# Altium PCB 2226_RegThermiqueExtension.PcbDoc
Units mm, origin at the board's own origin, x right, y up, seen from the top; angles counter-clockwise.
Board outline 35.54 x 101.6 mm, 2 copper layers (Top Layer, Bottom Layer), stack 1.586 mm thick; 13 components, 5 nets, 24 pads, 45 vias.
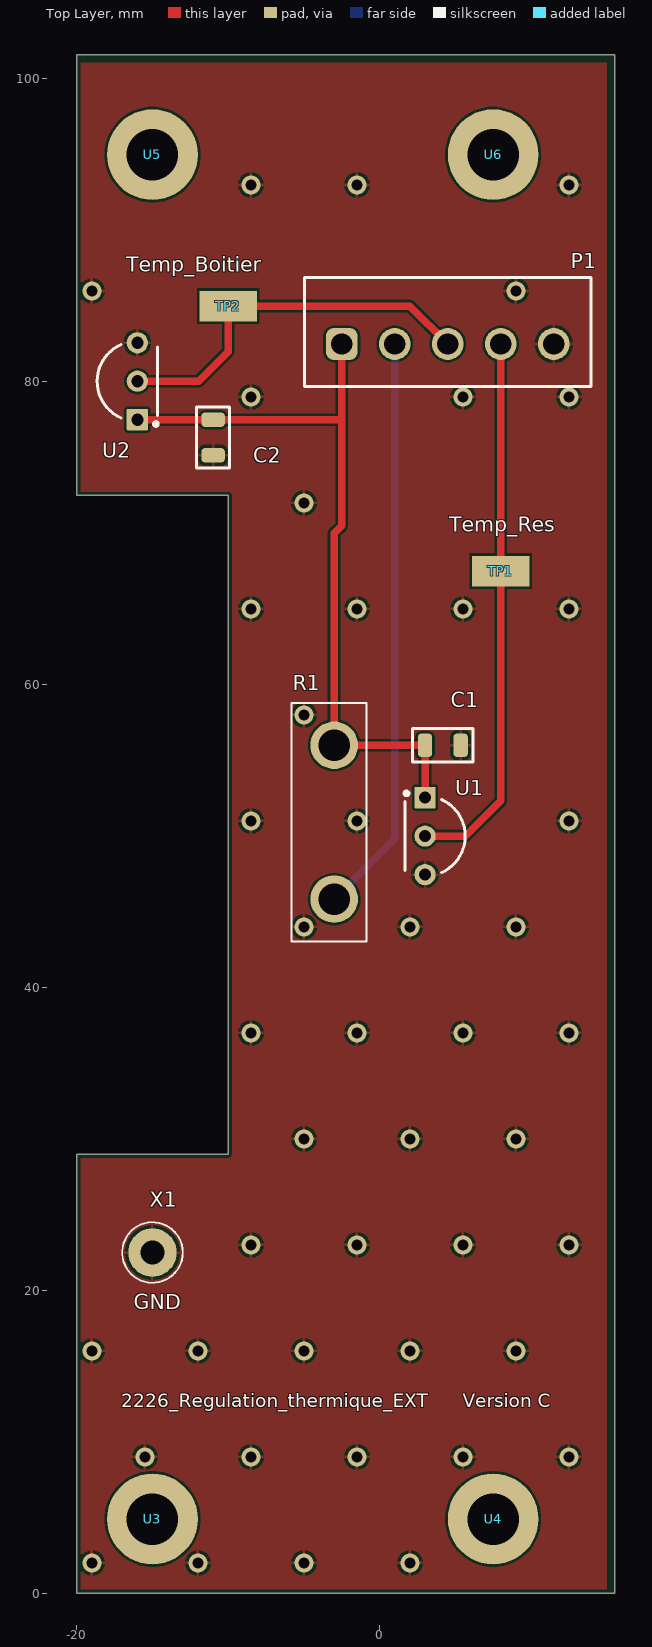
[diagram p0: Top Layer view]
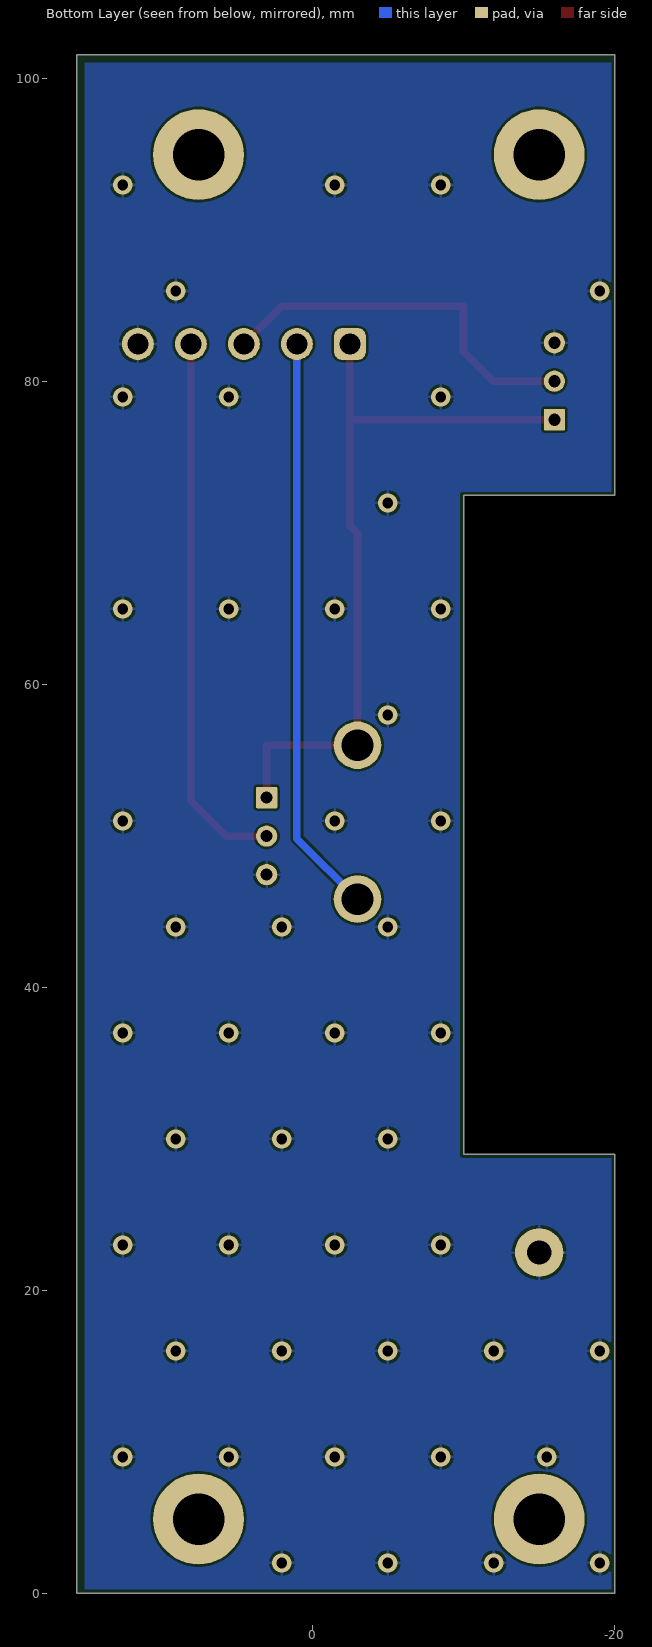
[diagram p1: Bottom Layer view, seen from below]

## Layer stack, top to bottom
Top Solder: solder mask 0.0102, Solder Resist, Dk 3.5
Top Layer: signal copper 0.018
Dielectric1: core 1.55, FR-4, Dk 4.8
Bottom Layer: signal copper 0.018
Bottom Solder: solder mask 0.0102, Solder Resist, Dk 3.5

## Board outline
-20,72.5 -20,101.6 15.54,101.6 15.54,0 -20,0 -20,28.985 -10,28.985 -10,72.5

## Design rules (kind name [scope] priority, off if disabled: settings)
BoardOutlineClearance [All] p1: gap=0.25 ignorepadtopadclearanceinfootprint=FALSE except(0: Arc-SplitContinuation Track-OutlineEdge Track-SplitContinuation SMDPad-SplitContinuation THPad-SplitContinuation Via-SplitContinuation Fill-SplitContinuation Poly-SplitContinuation Region-SplitContinuation Text-SplitContinuation)
Clearance Clearance-xPP-xTP-xTT [All] p1: gap=0.151 ignorepadtopadclearanceinfootprint=FALSE
ComponentClearance [All] p1: gap=0.25 collisioncheckmode=3 verticalgap=0.25 showdistances=FALSE
DiffPairsRouting [All] p1: maxlimit=0.25 minlimit=0.25 mostfreqgap=0.25 toplayer_minwidth=0.381 toplayer_maxwidth=0.381 toplayer_prefwidth=0.381 bottomlayer_minwidth=0.381 bottomlayer_maxwidth=0.381 bottomlayer_prefwidth=0.381 maxuncoupledlength=12.5
Height [All] p1: minheight=0 maxheight=25 prefheight=12.5
HoleSize HoleSize-PTH [All] p1: absolutevalues=TRUE maxlimit=10 minlimit=0.25 maxpercent=80.000 minpercent=20.000
HoleToHoleClearance [All] p1: gap=0.35 allowstackedmicrovias=TRUE
MinimumAnnularRing "Minimum IAR  >0.45mm" [((ObjectKind = 'Pad') OR (ObjectKind = 'Via')) And (Layer = 'MultiLayer') And (HoleDiameter > AsMM(0.45))] p1: minimumring=0.175 // minimum inner annular ring for pads > 0.45mm finished hole size
MinimumAnnularRing "Minimum IAR <=0.45mm" [((ObjectKind = 'Pad') OR (ObjectKind = 'Via')) And (Layer = 'MultiLayer') And (HoleDiameter <= AsMM(0.45))] p2: minimumring=0.175 // minimum inner annular ring for pads <= 0.45mm finished hole size
MinimumSolderMaskSliver [All] p1: minsoldermaskwidth=0.08
PasteMaskExpansion [All] p1: expansion=-0.025
PlaneClearance PlaneClearance-IPI [All] p1: clearance=0.5
PlaneConnect [All] p1: planeconnectstyle=Relief reliefexpansion=0.175 reliefentries=4 reliefconductorwidth=0.2 reliefairgap=0.2
PolygonConnect PolygonConnect-xTW [All] p1: connectstyle=Relief reliefconductorwidth=0.2 reliefentries=4 polygonreliefangle="90 Angle" airgapwidth=0.2
RoomDefinition Extension [InComponentClass('Extension')] p1: confinementstyle=ConfineIn formatcopy=TRUE lockcomponents=FALSE outline -184,-70.197 491.066,-70.197 491.066,147.5 -184,147.5
RoutingCorners [All] p1: cornerstyle=45-Degree minsetback=2.5 maxsetback=2.5
RoutingVias RoutingViasES [All] p1: holewidth=0.3 width=0.65 viastyle="Through Hole" minholewidth=0.25 minwidth=0.61 maxholewidth=1 maxwidth=1.5 // finishet hole size <= 0.45mm
SilkToSilkClearance [All] p1: silktosilkclearance=0
SilkToSolderMaskClearance SilkscreenOverComponentPads [IsPad] p1: minsilkscreentomaskgap=0 clearancetoexposedcopper=TRUE
SolderMaskExpansion [All] p1: expansion=0 istentingtop=FALSE
SupplyNets "Schematic Supply Nets_1" [InNet('GND')] p1: voltage=0.000
SupplyNets "Schematic Supply Nets" [InNet('+12V')] p2: voltage=0.000
UnRoutedNet [All] p1: checkbadconnections=TRUE
Width Width_C12_2 [InNet('NetC12_2')] p1: maxlimit=1.5 minlimit=0.5 preferedwidth=1.5
Width Width_B1_5 [InNet('NetB1_5')] p2: maxlimit=1.5 minlimit=0.5 preferedwidth=1.5
Width Width_C1_1 [InNet('NetC1_1')] p3: maxlimit=1.5 minlimit=0.5 preferedwidth=1.5
Width Width_12V [InNet('IN12V')] p4: maxlimit=1.5 minlimit=0.5 preferedwidth=0.5
Width Width-Vcc_PV [InNet('Vcc_PV')] p5: maxlimit=1.5 minlimit=0.5 preferedwidth=1
Width Width-Vcc_D5_A [InNet('NetD5_A')] p6: maxlimit=1.5 minlimit=0.5 preferedwidth=1
Width Width-Vcc_MOT+ [InNet('MOT+')] p7: maxlimit=1.5 minlimit=0.5 preferedwidth=1
Width Width-Vcc_MOT- [InNet('MOT-')] p8: maxlimit=1.5 minlimit=0.5 preferedwidth=1
Width Width_GND [InNet('GND')] p9: maxlimit=0.5 minlimit=0.254 preferedwidth=0.5
Width [All] p10: maxlimit=0.5 minlimit=0.254 preferedwidth=0.254
17 further rules are at their usual default settings.

## Components (designator, comment, footprint, x,y, rotation, side; value= is the part's Value field where it differs from the comment)
C1 "100nF" CAPC2012X08M 4.175,56 r180 top
C2 "100nF" CAPC2012X08M -11,76.325 r90 top
P1 "691321100005" 691321100005 4.5,83.3 r0 top
R1 "10R" TO1016P1601X521X2451-2 -3,50.92 r90 top
TP1 "Sensor_Temp_RP" KSTN-5019_V 8,67.5 r0 top value=5019
TP2 "Sensor_Temp_Boîtier" KSTN-5019_V -10,85 r180 top value=5019
U1 "LM35CAZ/LFT4" LM35CAZ/LFT4 3,50 r0 top
U2 "LM35CAZ/LFT4" LM35CAZ/LFT4 -16,80.04 r180 top
U3 "3.4" MECH-PHD340#1 -15.322,5 r90 top
U4 "3.4" MECH-PHD340#2 7.907,5 r90 top
U5 "3.4" MECH-PHD340#3 -15.1,95.1 r90 top
U6 "3.4" MECH-PHD340#4 35,67 r90 top
X1 "5011" Keystone_5011 -15,22.5 r90 top

## Footprints (in the part's own frame and the unit in brackets; to place one, negate y for a bottom-side part, rotate by r counter-clockwise, add the part's x,y. Pads: shape width x height; smd on the part's side, far side on the other; paste and mask are expansions set on the pad)
691321100005 [mm] "Vertical PCB Header, pitch 3.5mm, 05p"
  rrect50% 2.1x2.1 hole 1.4: 1(-7,-0.8)
  round 2.1 hole 1.4: 2(-3.5,-0.8) 3(0,-0.8) 4(3.5,-0.8) 5(7,-0.8)
  silkscreen extent -9.45,-3.6 9.45,3.6, body extent -9.45,-3.6 9.45,3.6, height 9.3
CAPC2012X08M [mm] "Chip Capacitor, 2-Leads, Body 2.00x1.25mm, IPC Low Density"
  rrect50% 0.95x1.55 smd: 1(-1.175,0) 2(1.175,0)
  silkscreen extent -2,-1.1 2,1.1, body extent -1.1,-0.72 1.1,0.72, height 0.85
Keystone_5011 [mm]
  round 3.2 hole 1.6 paste-2539.97: 1(0,0)
  silkscreen extent -2,-2 2,2, body extent -1.59,-1.59 1.59,1.59, height 8.13
KSTN-5019_V [mm] "Test Point, 1-Leads, Body 3.81x2.03mm"
  rect 3.8x2.03 smd: 1(0,0)
  body extent -1.9,-1.01 1.9,1.02, height 2.29
LM35CAZ/LFT4 [mm] "Footprint et modèle 3D repris du LM35DZ/NOPB"
  rrect7% 1.4x1.4 hole 0.8: 1(0,2.54)
  round 1.4 hole 0.8: 2(0,0) 3(0,-2.54)
  silkscreen extent -1.35,-2.41 2.65,2.95, body extent -1.33,-2.83 2.35,2.83, height 9.01
MECH-PHD340#1 [mm] "Plated hole 3.4mm"
  round 6 hole 3.4 paste-2539.97: 1(-0.1,-0.322)
MECH-PHD340#2 [mm] "Plated hole 3.4mm"
  round 6 hole 3.4 paste-2539.97: 1(-0.1,0.407)
MECH-PHD340#3 [mm] "Plated hole 3.4mm"
  round 6 hole 3.4 paste-2539.97: 1(-0.1,-0.1)
MECH-PHD340#4 [mm] "Plated hole 3.4mm"
  round 6 hole 3.4 paste-2539.97: 1(28,27.5)
TO1016P1601X521X2451-2 [mm]
  round 3.14 hole 2.09: 1(-5.08,0) 2(5.08,0)
  silkscreen extent -7.88,-2.13 7.88,2.82

## Part data
C1 C2: library part CMP-065-000038-2, "CAPC 100nF X7R 50V 10% 2012 (0805 INCH)", Dielectric=X7R, Manufacturer=TDK, Manufacturer Number=C2012X7R1H104K085AA, Supplier Part Number 1="FAB.0805_C 100n", TemperatureRange="-55°C to +125°C", Tolerance=±10%, Voltage=50V, Category=Passives, IsStocked=1, PN=PN-747862, SubCategory="Condensateurs ceramique", Supplier 1=ETML, Supplier Price 1=0.0200
P1: library part CMP-1502-01786-3, "3211; 3.5MM Pitch Straight Pluggable Term Block, Pcb Header, Through Hole, 5 Way", Color=Green, Current=10A, Voltage=300V, Contact Material=Brass, Gender=Male, Height=12.7mm, Lead Pitch=3.5mm, Length=7mm, Mount="Through Hole", Number Of Contacts=5, Number of Levels=1, Number of Pins=5, Number of Positions Per Level=5, Number of Rows=1, Orientation=Vertical, Packaging=Box, Pitch=3.5052mm, RoHS=Compliant, Termination=Solder, Width=22.1mm
R1: library part AP101_6R2_J, "10 Ohms Â±5% 100W Through Hole Resistor TO-247-2 Moisture Resistant, Non-Inductive Thick Film / AP101_10R_J", Package=None, Availability=Unavailable, MP=AP101_6R2_J, Price=None
TP1 TP2: library part CMP-1672-00008-1, "Test Point, 1 Position SMD, RoHS, Tape and Reel", Package Quantity=1000, ComponentLink1Description="Manufacturer URL", ComponentLink1URL=http://www.keyelco.com/, ComponentLink2Description=Datasheet, ComponentLink2URL=http://www.keyelco.com/product-pdf.cfm?p=1357, Contact Plating=Silver, DatasheetVersion=03/2014, Mount="Surface Mount", Mounting Technology="Surface Mount", PackageDescription="1-Pin Surface Mount Device, Body 3.81 x 2.03 mm", PackageReference=5019, Packaging="Tape and Reel", Pins=1, RoHSCompliant=True
U1 U2: library part LM35CAZLFT4, "1C high voltage analog temperature sensor, 10 mV/C 3-TO-92", Manufacturer_Name="Texas Instruments", Copyright="Copyright (C) 2025 Ultra Librarian. All rights reserved.", Manufacturer_Part_Number=LM35CAZ/LFT4, RefDes=RefDes, Type=LM35CAZ
U3 U4 U5 U6: library part CMP-063-000000-1, "Plated Hole  3.4mm", Category=Others, IsStocked=False, PN=PN-814249, SubCategory=Mecaniques
X1: library part CMP-054-000005-1, "TEST THT MULTIPURPOSE BK", Manufacturer=Keystone, Supplier Part Number 1=MAG.428.014, Category=Connectors, IsStocked=True, Manufacturer Number=5011, PN=PN-926990, SubCategory=Testpoints, Supplier 1=ETML, Supplier Price 1=0.2439

## Via types
v1: diameter 1.27, hole 0.711, Top Layer to Bottom Layer, tented both sides, 45 vias

## Nets (pads, with @x,y where several pads share a name; then routed paths per layer and width w, separated by ;. In a path a pad name is that pad's centre, name@x,y a point inside that pad or via, vN(x,y) a via of type N, cw(c..) or ccw(c..) an arc to the next point about the centre after c; other vN are vias at no path point)
+12V: C1.2 C2.2 P1.1 R1.2 U1.1 U2.1 | length 49.7
  Top Layer w0.5: U2.1 C2.2 -2.5,77.5 ; P1.1 -2.5,77.5 ; U1.1 C1.2 R1.2 -3,70 -2.5,70.5 -2.5,77.5
GND: C1.1 C2.1 P1.5 U1.3 U2.3 X1.1
  other v1: -19,2 -12,2 -5,2 2,2 -15.5,9 -8.5,9 -1.5,9 5.5,9 12.5,9 -19,16 -12,16 -5,16 2,16 9,16 -8.5,23 -1.5,23 5.5,23 12.5,23 -5,30 2,30 9,30 -8.5,37 -1.5,37 5.5,37 12.5,37 -5,44 2,44 9,44 -8.5,51 -1.5,51 12.5,51 -5,58 -8.5,65 -1.5,65 5.5,65 12.5,65 -5,72 -8.5,79 5.5,79 12.5,79 -19,86 9,86 -8.5,93 -1.5,93 12.5,93
NetP1_2: P1.2 R1.1 | length 38.3
  Bottom Layer w0.5: R1.1 1,49.84 P1.2
Sensor_Temp_Boîtier: P1.3 TP2.1 U2.2 | length 25.3
  Top Layer w0.5: U2.2 -11.96,80.04 -10,82 TP2.1 2,85 P1.3
Sensor_Temp_RP: P1.4 TP1.1 U1.2 | length 36.1
  Top Layer w0.5: U1.2 5.665,50 8,52.335 TP1.1 P1.4
pads on no net: U3.1 U4.1 U5.1 U6.1

## Polygon pours and split planes (outlines as drawn)
GND on Top Layer "GND_L01_P000" (solid, pour order 0): -40.3,101.06 15,101.06 15,0 -40.3,0
GND on Bottom Layer "GND_L02_P001" (solid, remove dead copper, pour order 1): -40.3,101.06 15,101.06 15,0 -40.3,0

## Silkscreen, mask and mechanical layers (free items; w line width, h text height)
Top Overlay:
  text "Temp_Boitier" at -16.746,87.255 h1
  text "Temp_Res" at 4.596,70.087 h1
  text "GND" at -16.246,18.754 h1
  text "2226_Regulation_thermique_EXT" at -17.053,12 h1.52
  text "Version C" at 5.5,12 h1.52
Board Outline (ES):
  lines w0.254: -20,0 -20,16.26 -20,28.985 -10,28.985 -10,72.5 -20,72.5 -20,90.46 -20,101.6 15.54,101.6 15.54,0 -20,0

## Dimensions
15.54,101.6 to 15.54,0 on Top Dims
-40.3,0 to 15,0 on Top Dims
7.5,95 to 7.6,4.9 on Top Dims